# Altium PCB MAIN.PcbDoc
Units mm, origin at the board's own origin, x right, y up, seen from the top; angles counter-clockwise.
Board outline 46.35 x 37.46 mm, 2 copper layers (Top Layer, Bottom Layer); 48 components, 40 nets, 162 pads, 7 vias.
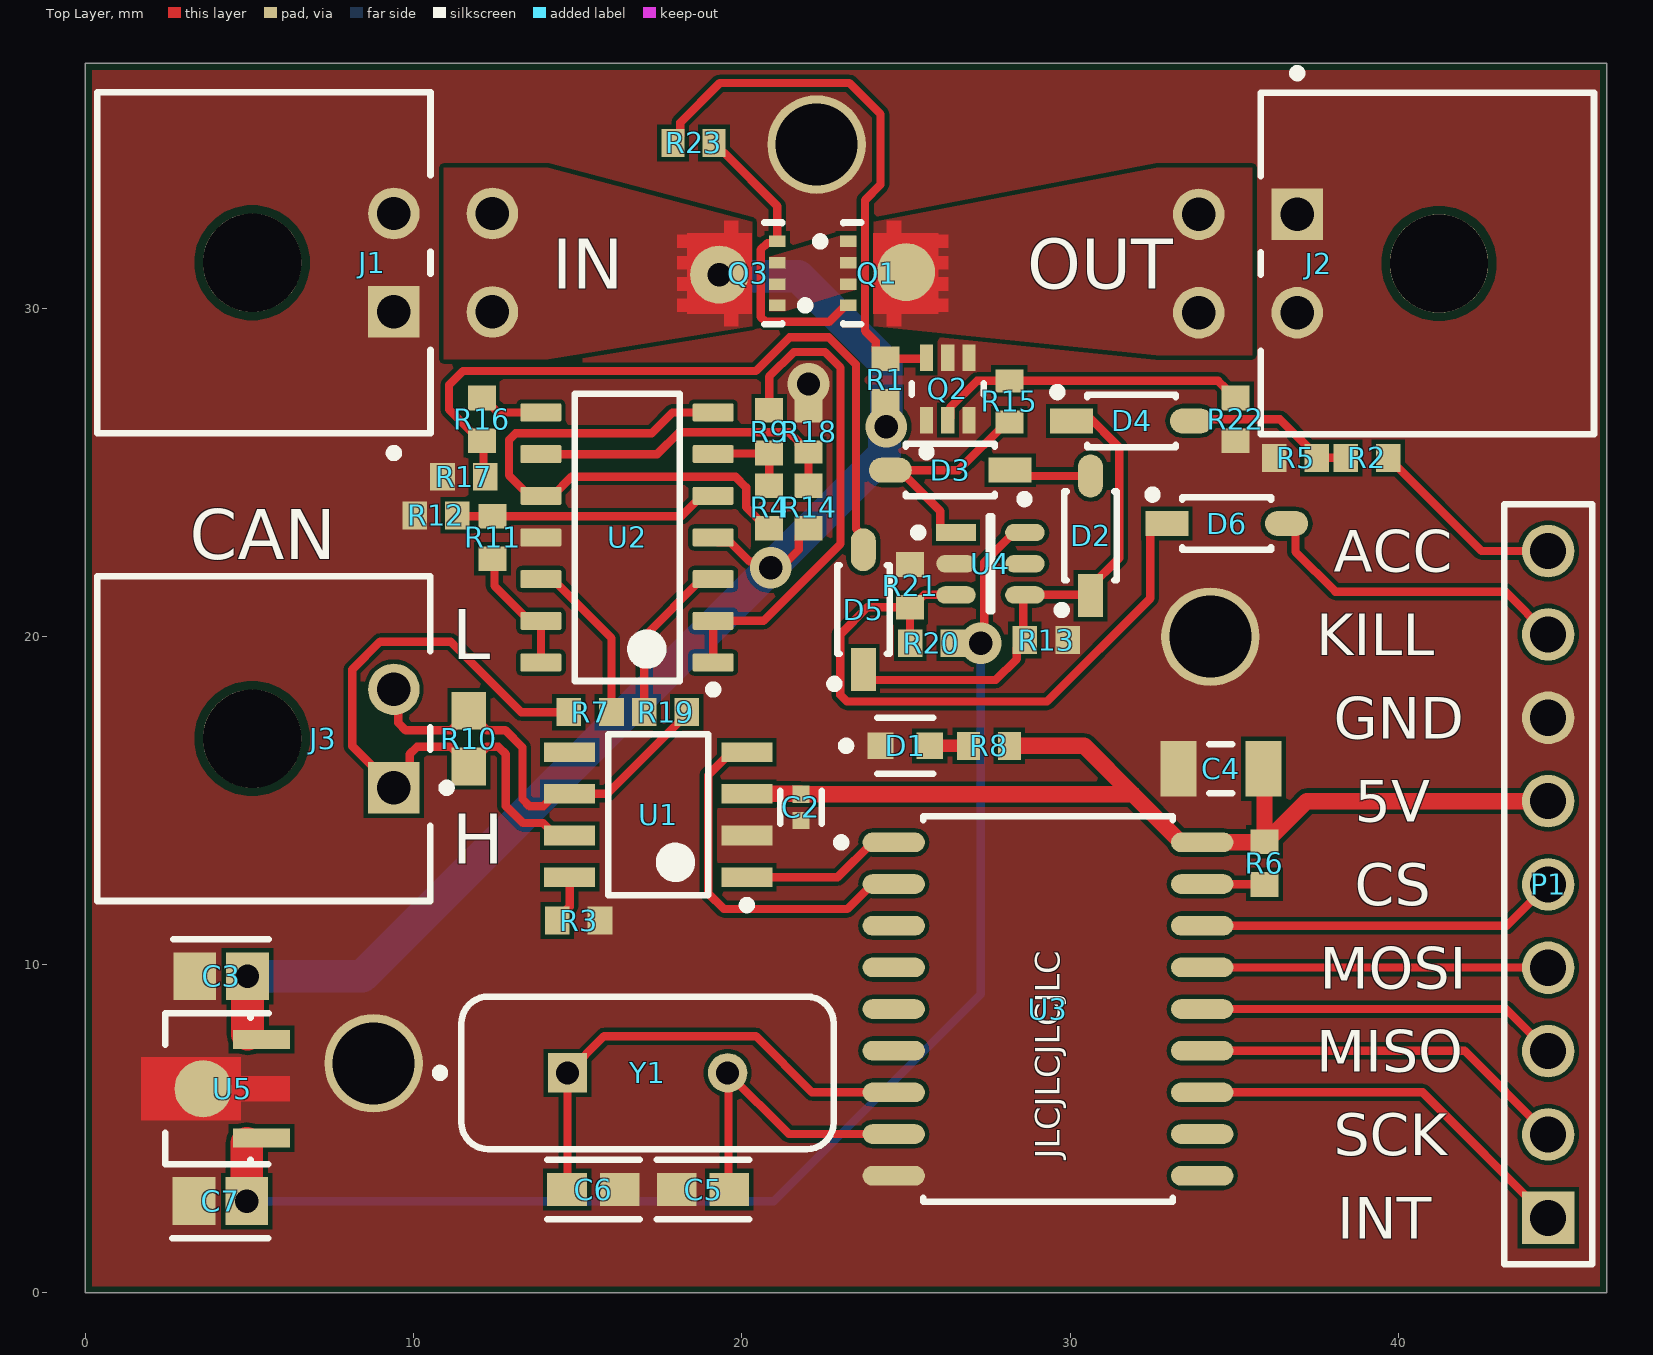
[diagram p0: Top Layer view]
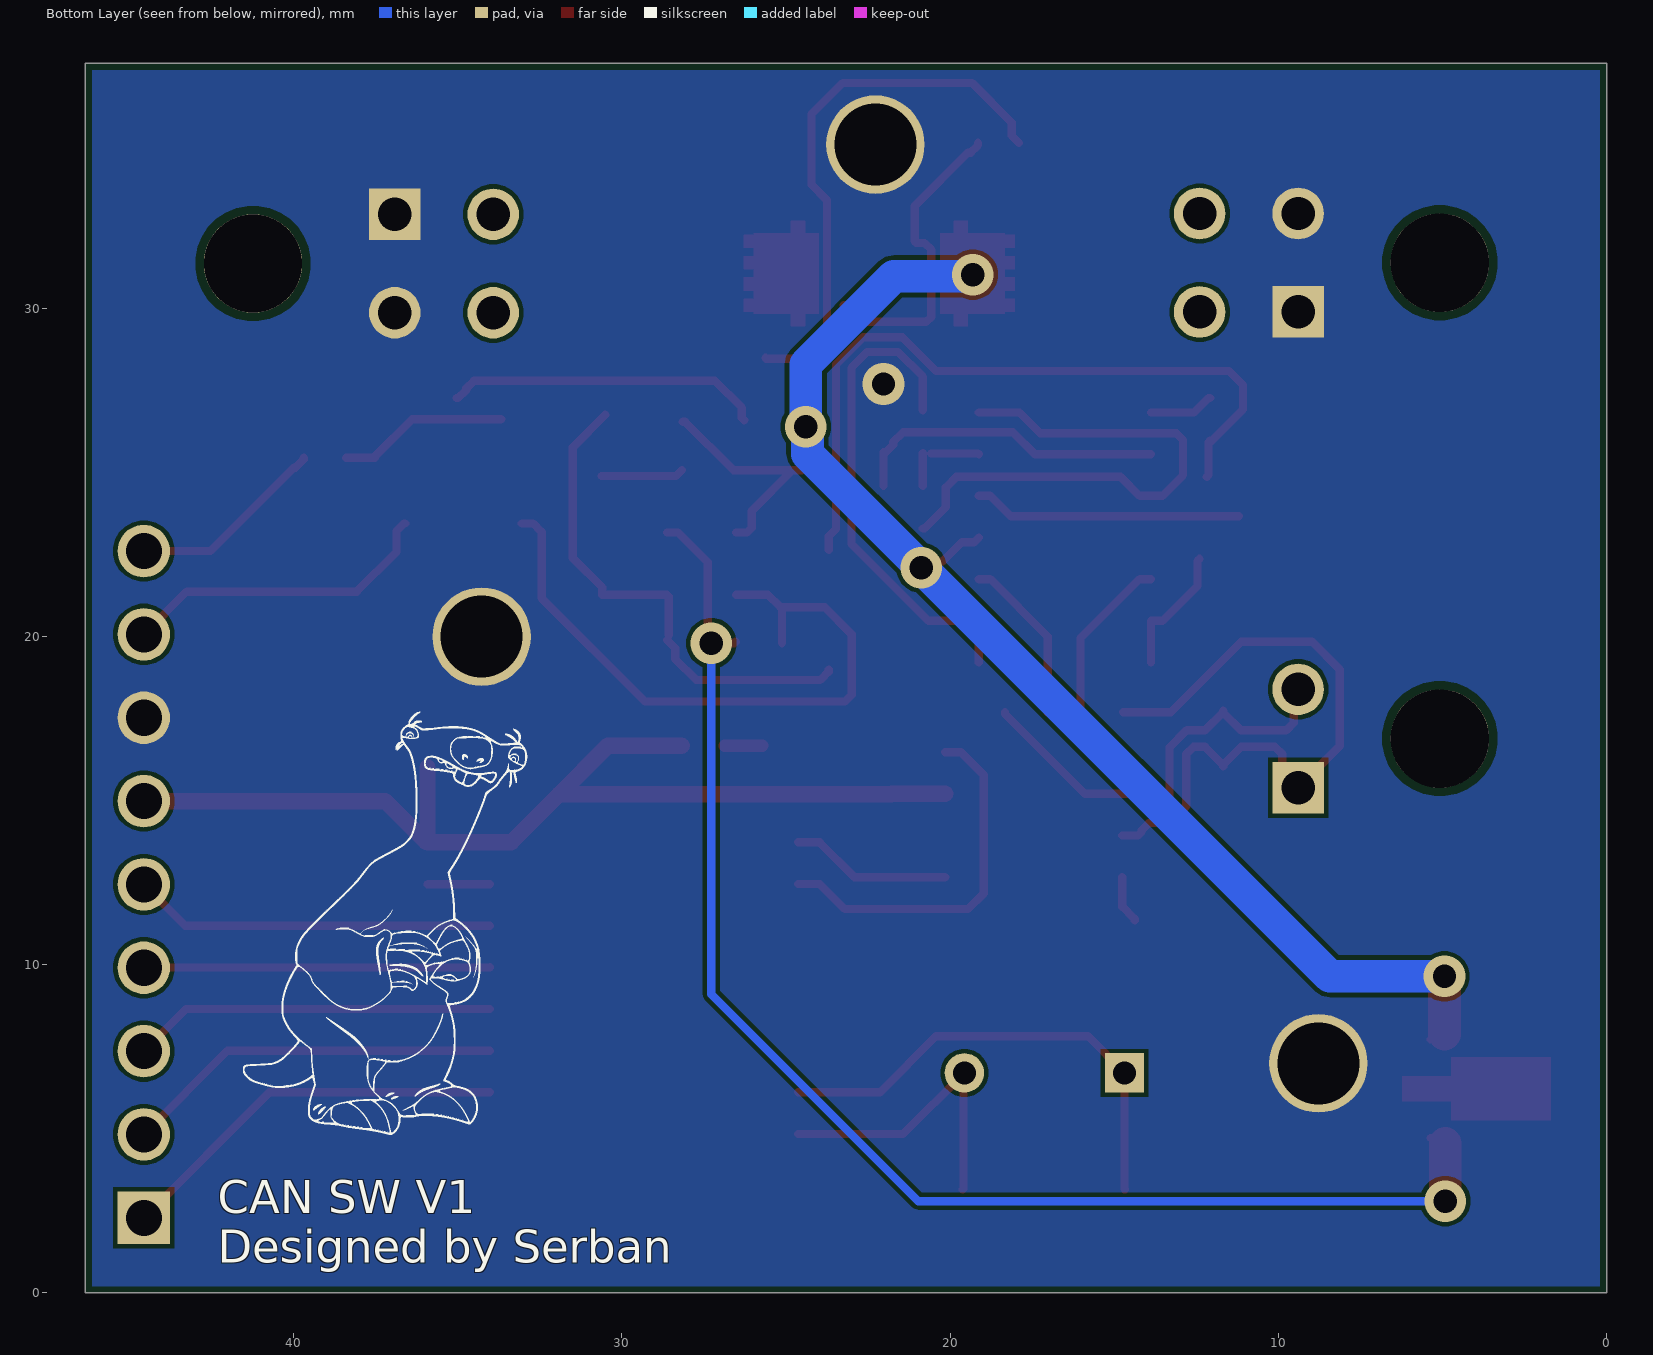
[diagram p1: Bottom Layer view, seen from below]
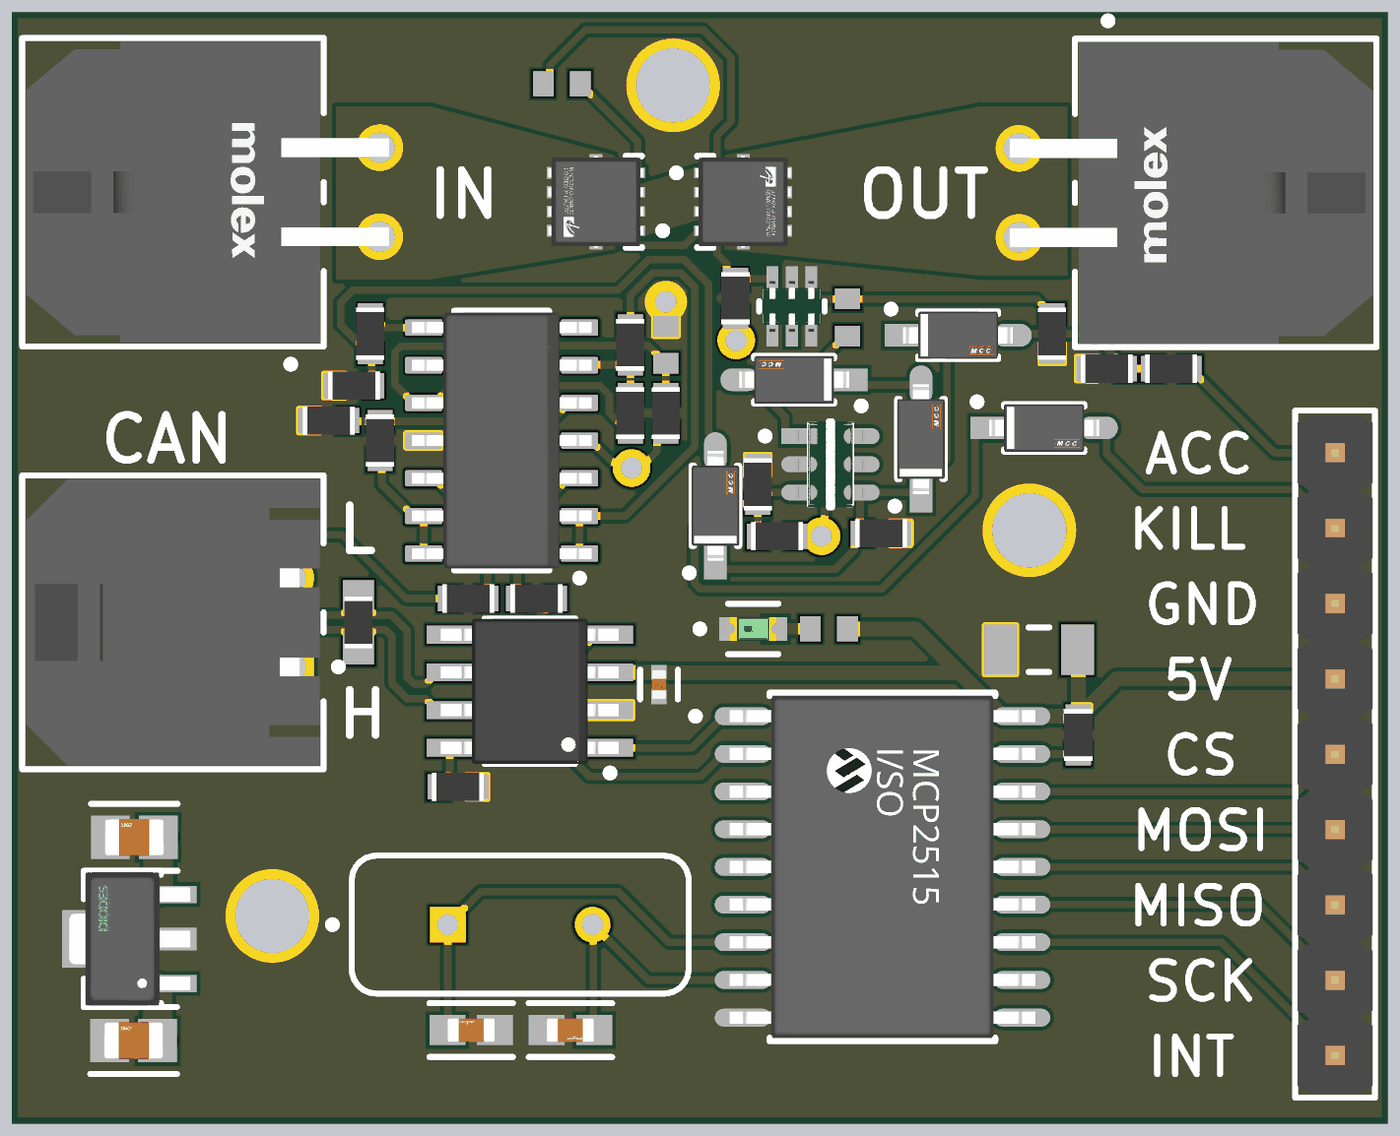
[diagram p2: 3D render of the assembled board from above, using the file's embedded part models]

## Layer stack, top to bottom
Top Solder: solder mask 0.0102, Solder Resist, Dk 3.5
Top Layer: signal copper 0.0356
Dielectric 1: dielectric 0.32, FR-4, Dk 4.8
Bottom Layer: signal copper 0.0356
Bottom Solder: solder mask 0.0102, Solder Resist, Dk 3.5

## Board outline
-0.005,37.47 46.35,37.47 46.35,0.005 -0.005,0.005

## Design rules (kind name [scope] priority, off if disabled: settings)
BoardOutlineClearance [All] p1: gap=0.2 ignorepadtopadclearanceinfootprint=FALSE
Clearance [All] p1: gap=0.127 ignorepadtopadclearanceinfootprint=FALSE except(0.25: Arc-Hole Track-Hole SMDPad-Hole THPad-Hole Via-Hole Fill-Hole Poly-Hole Region-Hole Text-Hole)
ComponentClearance [All] p1: gap=0.127 collisioncheckmode=3 verticalgap=0.127 showdistances=TRUE
DiffPairsRouting [All] p1: maxlimit=0.254 minlimit=0.127 mostfreqgap=0.127 toplayer_minwidth=0.127 toplayer_maxwidth=25.4 toplayer_prefwidth=0.127 bottomlayer_minwidth=0.127 bottomlayer_maxwidth=25.4 bottomlayer_prefwidth=0.127 maxuncoupledlength=12.7
Height [All] p1: minheight=0 maxheight=1816.048 prefheight=12.7
HoleSize [All] p1: absolutevalues=TRUE maxlimit=6.3 minlimit=0.3 maxpercent=80.000 minpercent=20.000
HoleToHoleClearance [All] p1: gap=0.25 allowstackedmicrovias=FALSE
MinimumAnnularRing [All] p1: minimumring=0.076
MinimumSolderMaskSliver [All] p1: minsoldermaskwidth=0
PlaneClearance [All] p1: clearance=0.127
PlaneConnect PlaneConnectPowerPads [InPadClass('PowerPads')] p1: planeconnectstyle=Direct reliefexpansion=0.508 reliefentries=4 reliefconductorwidth=0.254 reliefairgap=0.254
PlaneConnect [All] p2: pad.planeconnectstyle=Relief pad.reliefexpansion=0.3 pad.reliefentries=4 pad.reliefconductorwidth=0.127 pad.reliefairgap=0.127 via.planeconnectstyle=Direct via.reliefexpansion=0.3 via.reliefentries=4 via.reliefconductorwidth=0.127 via.reliefairgap=0.127
PolygonConnect PolygonConnectPowerPads [All vs (InPadClass('PowerPads'))] p1: connectstyle=Direct reliefconductorwidth=0.254 reliefentries=4 polygonreliefangle="90 Angle" airgapwidth=0.254
PolygonConnect [All] p2: connectstyle=Direct reliefconductorwidth=0.127 reliefentries=4 polygonreliefangle="90 Angle" airgapwidth=0.127
RoutingVias [All] p1: holewidth=0.3 width=0.6 viastyle="Through Hole" minholewidth=0.3 minwidth=0.6 maxholewidth=0.6 maxwidth=6.6
SilkToSilkClearance [All] p1: silktosilkclearance=0
SilkToSolderMaskClearance [IsPad] p1: minsilkscreentomaskgap=0.127 clearancetoexposedcopper=TRUE
SolderMaskExpansion [All] p1: expansion=0.075 istentingtop=FALSE
Width [All] p1: maxlimit=25.4 minlimit=0.127 preferedwidth=0.127 minimp=50.000000 maximp=50.000000 favimp=50.000000
20 further rules are at their usual default settings.

## Classes and differential pairs
differential pair CAN: +CAN_P -CAN_N

## Components (designator, comment, footprint, x,y, rotation, side; value= is the part's Value field where it differs from the comment)
C2 "C0402C104K8PACTU" FP-C0402-BB-MFG 21.8,14.8 r270 top value="0.10 μF"
C3 "CL21B225KAFNNNE" FP-0805-L_2_01_0_2-W_1_25-IPC_B 4.128,9.65 r180 top
C4 "1206GC102KAT1A" AVX-1206-2_L 34.6,15.975 r0 top
C5 "GRM188R60J106ME47D" FP-GRM188-0_1-e0_2_0_55-IPC_A 18.815,3.152 r0 top
C6 "GRM188R60J106ME47D" FP-GRM188-0_1-e0_2_0_55-IPC_A 15.473,3.152 r180 top
C7 "CL21B225KAFNNNE" FP-0805-L_2_01_0_2-W_1_25-IPC_B 4.103,2.8 r180 top
D1 "LTST-C190GKT" FP-LTST-C190GKT-MFG 24.975,16.675 r0 top
D2 "1N4148W-TP" FP-SOD-123-IPC_A 30.625,23.075 r90 top
D3 "1N4148W-TP" FP-SOD-123-IPC_A 26.35,25.075 r180 top
D4 "1N4148W-TP" FP-SOD-123-IPC_A 31.875,26.575 r0 top
D5 "1N4148W-TP" FP-SOD-123-IPC_A 23.7,20.825 r90 top
D6 "1N4148W-TP" FP-SOD-123-IPC_A 34.775,23.45 r0 top
J1 "43045-0402" FP-43045-0402-MFG 5.43,31.398 r270 top
J2 "43045-0402" FP-43045-0402-MFG 40.889,31.374 r90 top
J3 "43650-0201" FP-43650-0201-MFG 5.425,16.896 r270 top
P1 "61300911121" 61300911121 44.572,12.451 r90 top
Q1 "SISH615ADN-T1-GE3" SISH615ADN-T1-GE3-Footprint-1 24.636,31.11 r270 top
Q2 "SSM6N7002KFU,LF" FP-SSOP6-P-0_65A-MFG 26.275,27.55 r90 top
Q3 "SISH615ADN-T1-GE3" SISH615ADN-T1-GE3-Footprint-1 19.677,31.035 r90 top
R1 "ERJ3EKF1002V" RESC1609X55X30LL15T15 24.375,27.825 r270 top
R2 "ERJ3EKF1002V" RESC1609X55X30LL15T15 39.05,25.45 r0 top
R3 "ERJ3EKF1002V" RESC1609X55X30LL15T15 15.025,11.35 r180 top
R4 "ERJ3EKF1002V" RESC1609X55X30LL15T15 20.832,23.95 r270 top
R5 "ERJ3EKF1002V" RESC1609X55X30LL15T15 36.875,25.45 r0 top
R6 "ERJ3EKF1002V" RESC1609X55X30LL15T15 35.925,13.1 r270 top
R7 "ERJ3EKF1002V" RESC1609X55X30LL15T15 15.375,17.7 r0 top
R8 "ERJ-3EKF1001V" RESC1608X55X30LL15T15 27.525,16.675 r0 top
R9 "ERJ3EKF1002V" RESC1609X55X30LL15T15 20.832,26.25 r270 top
R10 "ERJ-3EKF1200V" RESC1609X55X30ML15T15 11.679,16.896 r270 top
R11 "ERJ3EKF1002V" RESC1609X55X30LL15T15 12.4,23.025 r90 top
R12 "ERJ3EKF1002V" RESC1609X55X30LL15T15 10.675,23.7 r180 top
R13 "ERJ3EKF1002V" RESC1609X55X30LL15T15 29.275,19.9 r0 top
R14 "ERJ3EKF1002V" RESC1609X55X30LL15T15 22.032,23.95 r270 top
R15 "ERJ-3EKF1001V" RESC1608X55X30LL15T15 28.15,27.175 r270 top
R16 "ERJ3EKF1002V" RESC1609X55X30LL15T15 12.075,26.625 r90 top
R17 "ERJ3EKF1002V" RESC1609X55X30LL15T15 11.525,24.875 r0 top
R18 "ERJ-3EKF1001V" RESC1608X55X30LL15T15 22.032,26.25 r270 top
R19 "ERJ3EKF1002V" RESC1609X55X30LL15T15 17.675,17.7 r180 top
R20 "ERJ3EKF1002V" RESC1609X55X30LL15T15 25.775,19.8 r180 top
R21 "ERJ3EKF1002V" RESC1609X55X30LL15T15 25.125,21.55 r270 top
R22 "ERJ3EKF1002V" RESC1609X55X30LL15T15 35.041,26.625 r270 top
R23 "ERJ-3EKF1001V" RESC1608X55X30LL15T15 18.525,35.05 r180 top
U1 "MCP2551-I/SN" MCHP-SN8_V 17.45,14.575 r180 top
U2 "LM324D" D0014A_L 16.5,23.025 r180 top
U3 "MCP2515-I/SO" FP-C04-051-MFG 29.328,8.653 r0 top
U4 "TLV1805DBVR" FP-DBV0006A-IPC_C 27.575,22.225 r0 top
U5 "AP7381-50Y-13" FP-SOT89-MFG 3.724,6.225 r90 top
Y1 "FOXSLF/160-20" FOX-FOXSLF160-20 17.124,6.708 r0 top

## Footprints (in the part's own frame and the unit in brackets; to place one, negate y for a bottom-side part, rotate by r counter-clockwise, add the part's x,y. Pads: shape width x height; smd on the part's side, far side on the other; paste and mask are expansions set on the pad)
61300911121 [mm] "Pin Header, pitch 2.54 mm, THT, Vertical, single row, 9p"
  rect 1.6x1.6 hole 1.1: 1(-10.16,0)
  round 1.6 hole 1.1: 2(-7.62,0) 3(-5.08,0) 4(-2.54,0) 5(0,0) 6(2.54,0) 7(5.08,0) 8(7.62,0) 9(10.16,0)
  silkscreen extent -11.58,-1.35 11.58,1.35, body extent -11.43,-1.27 11.43,1.27, height 8.57
AVX-1206-2_L [mm] "SMD, 2-Leads, Body 3.4x1.8mm, IPC High Density"
  rect 1.1x1.7 smd: 1(-1.3,0) 2(1.3,0)
  silkscreen extent -0.35,-0.75 0.35,0.75, body extent -1.7,-0.9 1.7,0.9, height 1.52
D0014A_L [mm] "SOIC, 14-Leads, Body 8.75x4mm, Pitch 1.27mm, IPC High Density"
  rrect18% 1.25x0.55 smd: 1(-2.625,3.81) 2(-2.625,2.54) 3(-2.625,1.27) 4(-2.625,0) 5(-2.625,-1.27) 6(-2.625,-2.54) 7(-2.625,-3.81) 8(2.625,-3.81) 9(2.625,-2.54) 10(2.625,-1.27) 11(2.625,0) 12(2.625,1.27) 13(2.625,2.54) 14(2.625,3.81)
  silkscreen extent -2.75,-4.38 1.6,4.76, body extent -3.02,-4.32 3.02,4.32, height 1.59
FOX-FOXSLF160-20 [mm] "THD, 2-Leads, Body 11.35x4.65mm"
  rect 1.2x1.2 hole 0.7: 1(-2.44,0)
  round 1.2 hole 0.7: 2(2.44,0)
  silkscreen extent -6.45,-2.32 5.68,2.32, body extent -5.67,-2.32 5.68,2.33, height 3.6
FP-0805-L_2_01_0_2-W_1_25-IPC_B [mm]
  rect 1.305x1.456 smd paste+0 mask+0: 1(-0.806,0) 2(0.806,0)
  silkscreen extent -1.46,-1.13 1.46,1.13, body extent -1.71,-0.98 1.71,0.98, height 0.25
FP-43045-0402-MFG [mm]
  rect 1.57x1.57 hole 1.02 paste-1000 mask+0: 1(1.5,3.965)
  round 1.57 hole 1.02 paste-1000 mask+0: 2(-1.5,3.965) 3(1.5,6.965) 4(-1.5,6.965)
  round 3 hole 3 unplated paste-1000 mask+0: ""(0,-0.355)
  silkscreen extent -5.2,-5.08 5.92,5.08, body extent -5.3,-5.18 5.3,7.85, height 0.25
FP-43650-0201-MFG [mm]
  rect 1.57x1.57 hole 1.02 paste-1000 mask+0: 1(1.5,3.97)
  round 1.57 hole 1.02 paste-1000 mask+0: 2(-1.5,3.97)
  round 3 hole 3 unplated paste-1000 mask+0: ""(0,-0.35)
  silkscreen extent -4.95,-5.07 4.95,5.7, body extent -5.05,-5.18 5.05,5.18, height 0.25
FP-C04-051-MFG [mm]
  rrect100% 1.9x0.6 smd paste+0 mask+0: 1(-4.7,5.08) 2(-4.7,3.81) 3(-4.7,2.54) 4(-4.7,1.27) 5(-4.7,0) 6(-4.7,-1.27) 7(-4.7,-2.54) 8(-4.7,-3.81) 9(-4.7,-5.08) 10(4.7,-5.08) 11(4.7,-3.81) 12(4.7,-2.54) 13(4.7,-1.27) 14(4.7,0) 15(4.7,1.27) 16(4.7,2.54) 17(4.7,3.81) 18(4.7,5.08)
  silkscreen extent -6.42,-5.87 3.8,5.87, body extent -5.75,-6.12 5.75,6.12, height 0.25
FP-C0402-BB-MFG [mm]
  rect 0.52x0.52 smd paste+0 mask+0: 1(-0.4,0) 2(0.4,0)
  silkscreen extent -0.5,-0.64 0.5,0.64, body extent -0.8,-0.4 0.8,0.4, height 0.25
FP-DBV0006A-IPC_C [mm]
  rect 1.205x0.53 smd paste+0 mask+0: 1(-1.05,0.95)
  rrect100% 1.205x0.53 smd paste+0 mask+0: 2(-1.05,0) 3(-1.05,-0.95) 4(1.05,-0.95) 5(1.05,0) 6(1.05,0.95)
  silkscreen extent -2.33,-1.45 0.05,1.45, body extent -1.75,-1.55 1.75,1.55, height 0.25
FP-GRM188-0_1-e0_2_0_55-IPC_A [mm]
  rect 1.208x1.012 smd paste+0 mask+0: 1(-0.802,0) 2(0.802,0)
  silkscreen extent -1.41,-0.91 1.41,0.91, body extent -1.91,-1.01 1.91,1.01, height 0.25
FP-LTST-C190GKT-MFG [mm]
  rect 0.8x0.8 smd paste+0 mask+0: 1(-0.75,0) 2(0.75,0)
  silkscreen extent -1.92,-0.85 0.85,0.85, body extent -1.25,-0.55 1.25,0.55, height 0.25
FP-SOD-123-IPC_A [mm]
  rect 1.308x0.762 smd paste+0 mask+0: 1(-1.825,0)
  rrect100% 1.308x0.762 smd paste+0 mask+0: 2(1.825,0)
  silkscreen extent -2.39,-0.8 1.35,1.01, body extent -2.98,-1.3 2.98,1.3, height 0.25
FP-SOT89-MFG [mm]
  rect 0.58x1.73 smd paste+0 mask+0: 1(-1.5,-1.635) 3(1.5,-1.635)
  round 1.74 smd paste+0 mask+0: 2(0,0.146)
  Top Layer region: -0.38,-2.5 0.38,-2.5 0.38,-1 0.967,-1 0.967,2.03 -0.967,2.03 -0.967,-1 -0.38,-1 -0.38,-2.5
  silkscreen extent -2.3,-1.3 2.3,1.3, body extent -2.4,-2.6 2.4,2.13, height 0.25
FP-SSOP6-P-0_65A-MFG [mm]
  rect 0.8x0.4 smd paste+0 mask+0: 1(-0.95,0.65) 2(-0.95,0) 3(-0.95,-0.65) 4(0.95,-0.65) 5(0.95,0) 6(0.95,0.65)
  silkscreen extent -2.05,-1.1 0.18,1.1, body extent -1.45,-1.2 1.45,1.2, height 0.25
MCHP-SN8_V [mm] "SOIC, 8-Leads, Body 4.9x3.9mm, Pitch 1.27mm"
  rect 1.55x0.6 smd: 1(-2.7,1.905) 2(-2.7,0.635) 3(-2.7,-0.635) 4(-2.7,-1.905) 5(2.7,-1.905) 6(2.7,-0.635) 7(2.7,0.635) 8(2.7,1.905)
  silkscreen extent -2.83,-2.45 1.53,2.88, body extent -3,-2.45 3,2.45, height 1.75
RESC1608X55X30LL15T15 [mm] "Chip Resistor, 2-Leads, Body 1.60x0.80mm, IPC High Density"
  rect 0.7x0.85 smd: 1(-0.625,0) 2(0.625,0)
  body extent -0.87,-0.48 0.87,0.48, height 0.55
RESC1609X55X30LL15T15 [mm] "Chip Resistor, 2-Leads, Body 1.75x0.95mm, IPC High Density"
  rect 0.75x0.85 smd: 1(-0.65,0) 2(0.65,0)
  body extent -0.87,-0.48 0.87,0.48, height 0.55
RESC1609X55X30ML15T15 [mm] "Chip Resistor, 2-Leads, Body 1.75x0.95mm, IPC Low Density"
  rect 1.15x1.05 smd: 1(-0.85,0) 2(0.85,0)
  body extent -0.87,-0.48 0.87,0.48, height 0.55
SISH615ADN-T1-GE3-Footprint-1 [mm]
  rect 0.35x0.5 smd paste+0 mask+0: 1(-0.937,-1.4) 2(-0.288,-1.4) 3(0.363,-1.4) 4(1.012,-1.4)
  round 1.769 smd paste+0 mask+0: 5-6-7-8(0,0.367)
  Top Layer region: -1.187,-0.63 -1.187,-0.215 -1.568,-0.215 -1.568,0.215 -1.187,0.215 -1.187,1.35 -1.137,1.35 -1.137,1.65 -0.737,1.65 -0.737,1.35 -0.487,1.35 -0.487,1.65 -0.088,1.65 -0.088,1.35 0.163,1.35 0.163,1.65 0.563,1.65 0.563,1.35 0.813,1.35 0.813,1.65 1.212,1.65 1.212,1.35 1.262,1.35 1.262,0.215 1.643,0.215 1.643,-0.215 1.262,-0.215 1.262,-0.63
  silkscreen extent -1.51,-2.37 1.59,-1.01, body extent -1.67,-1.75 1.74,1.75, height 0.25

## Part data
C2: library part CMP-2008-02046-2, "CAP CER 0.1UF 10V X5R 0402", Capacitance="0.10 μF", Manufacturer=Kemet, Package=C0402-BB, Temperature="-55°C to +125°C", Temperature Characteristic=X5R, Temperature Coefficient=15%, Temperature Range High=+125°C, Temperature Range Low=-55°C, Tolerance=0.1, Voltage Rating="10 V", Automotive=No, Category=Cap, ComponentLink2Description=Datasheet, ComponentLink2URL=https://content.kemet.com/datasheets/KEM_C1002_X7R_SMD.pdf, Device Class L1="Passive Components", Device Class L2=Capacitors, Device Class L3="Ceramic Capacitors", Digikey Description="CAP CER 0.1UF 10V X5R 0402", Height=0.55mm, Ipc Land Pattern Name=CAPC10050X50, Lead Free=Yes, Manufacturer Part Number=C0402C104K8PACTU, Material=Ceramic, Mouser Description="Capacitor 100 nF 10 VDC 0402", Octopart=https://octopart.com/c0402c104k8pactu-kemet-140039, RoHS=TRUE
C3 C7: library part CMP-2007-04514-2, Capacitance=2.2uF, Case Code (Imperial)=0805, Case Code (Metric)=2012, Dielectric=X7R, Max Operating Temperature=125°C, Min Operating Temperature=-55°C, Package Quantity=3000, Tolerance=10%, Voltage=25V, Case/Package=0805, Construction=Flat, Contact Plating=Tin, Depth=1.25mm, Height=1.52mm, Lead Free="Lead Free", Length=2.01mm, Mount="Surface Mount", Number of Pins=2, Packaging="Tape and Reel", Radiation Hardening=No, REACH SVHC="No SVHC", RoHS Compliant=Yes, Series=FlEXITERM, Termination=SMD/SMT, Thickness=0.06inch, Voltage Rating=25V, Voltage Rating (DC)=25V, Width=0.049inch
C4: library part CMP-2000-05468-1, "Chip Capacitor, 1 nF, +/- 10%, -55 to 125 degC, 1206 (3216 Metric), RoHS, Tape and Reel", Capacitance=0.001uF, Case Size/Dimension=1206, Dielectric=X7R, Manufacturer=AVX, Package Description="2-Pin SMD, Body 3.4 x 1.8 mm", Rated Voltage=2000V, Tolerance=10%, Tolerance (%)=±10%, Datasheet URL=https://datasheet.ciiva.com/11787/0900766b80ed4c37-11787781.pdf, Datasheet Version=11/2010, Manufacturer URL=http://www.avx.com/, Mounting Technology=SurfaceMount, Package Reference=1206, PartNumber=1206GC102KAT1A, Voltage Rating DC=2000V
C5 C6: library part CMP-2006-02792-2, "Chip Multilayer Ceramic Capacitors for General Purpose, 0603, 10uF, X5R, 15%, 20%, 6.3V", Capacitance=10uF, Case Code (Imperial)=0603, Case Code (Metric)=1608, Dielectric=X5R, Max Operating Temperature=85°C, Min Operating Temperature=-55°C, Package Quantity=4000, Tolerance=20%, Voltage=6.3V, Case/Package=0603, Depth=0.8mm, Height=0.8mm, Lead Free="Lead Free", Length=1.6mm, Material=Ceramic, Mount="Surface Mount", Packaging="Tape and Reel", Radiation Hardening=No, REACH SVHC="No SVHC", Termination=SMD/SMT, Thickness=0.035inch, Voltage Rating=6.3V, Voltage Rating (DC)=6.3V, Width=0.031inch
D1: library part CMP-22017-000005-2, "LED GREEN CLEAR CHIP SMD", Case Code (Imperial)=0603, Case Code (Metric)=1608, Color=Green, Forward Current=30mA, Forward Voltage=2.1V, Lens Color=Colorless, Max Operating Temperature=85°C, Min Operating Temperature=-55°C, Package Quantity=1, Power Dissipation=100mW, Reverse Voltage=5V, Test Current=10mA, Voltage=2V, Case/Package=0603, Depth=0.8mm, Dominant Wavelength=569nm, Height=0.8mm, Illumination Color=Green, Lead Free="Lead Free", Length=1.6mm, Lens Style=Clear, Lens Transparency=Clear, Luminous Intensity=6mcd, Mount="Surface Mount", Number of Elements=1, Number of LEDs=1, Number of Pins=2, Packaging="Tape and Reel", Power Rating=100mW, Radiation Hardening=No, Viewing Angle=130°, Wavelength=565nm, Width=0.8mm
D2 D3 D4 D5 D6: library part CMP-2000-04993-2, "DIODE GEN PURP 100V 150MA SOD123", Average Rectified Current=150mA, Capacitance=4pF, Forward Voltage=1V, Max Forward Surge Current (Ifsm)=1A, Max Operating Temperature=150°C, Max Repetitive Reverse Voltage (Vrrm)=100V, Max Reverse Leakage Current=5uA, Max Surge Current=2A, Min Operating Temperature=-65°C, Package Quantity=3000, Power Dissipation=400mW, Current Rating=150mA, Element Configuration=Single, Forward Current=150mA, Height=1.2mm, Lead Free="Lead Free", Length=2.85mm, Max Reverse Voltage (DC)=100V, Mount="Surface Mount", Number of Pins=2, Output Current=150mA, Packaging="Tape and Reel", Peak Non-Repetitive Surge Current=2A, Polarity=Standard, Radiation Hardening=No, Recovery Time=4ns, Reverse Recovery Time=4ns, Voltage Rating (DC)=100V, Width=1.8mm
J1 J2: library part CMP-04776-000323-1, "CONN HEADER R/A 4POS 3MM", Case/Package=0402, Color=Black, Contact Resistance=10mR, Current Rating=5A, Flammability Rating="UL94 V-0", Insulation Resistance=1GR, Max Operating Temperature=105°C, Max Voltage Rating (DC)=250.25kV, Min Operating Temperature=-40°C, Package Quantity=2232, Voltage Rating=600V, Voltage Rating (DC)=250V, Contact Gender=Male, Contact Material=Brass, Contact Plating=Gold, Depth=12.2mm, Diameter=3mm, Gender=Male, Glow Wire Compliant=Compliant, Halogen Free="Low Halogen", Height=8.77mm, Housing Color=Black, Housing Material=Thermoplastic, Lead Free="Lead Free", Length=10.15mm, Max Current Rating=5A, Mount="Through Hole", Number of Circuits=4, Number Of Contacts=4, Number of Positions=4, Number Of Rows=2, Orientation="Right Angle", Packaging=Tray, Pitch=3mm, Row Spacing=3mm, Series="Micro-Fit 3.0", Termination=Solder
J3: library part CMP-04776-000557-1, "CONN HEADER R/A 2POS 3MM", Case/Package=0201, Color=Black, Contact Resistance=10mR, Current Rating=5A, Flammability Rating="UL94 V-0", Insulation Resistance=1GR, Max Operating Temperature=105°C, Min Operating Temperature=-40°C, Package Quantity=3927, Voltage Rating=600V, Voltage Rating (DC)=250V, Contact Material=Brass, Contact Plating=Gold, Depth=9.9mm, Gender=Male, Glow Wire Compliant=Compliant, Halogen Free="Low Halogen", Housing Color=Black, Housing Material=Thermoplastic, Length=9.65mm, Mount="Through Hole", Number of Circuits=2, Number Of Contacts=2, Number of Ports=1, Number of Positions=2, Number Of Rows=1, Number of Terminals/Pins=2, Orientation="Right Angle", Packaging=Tray, Pitch=3mm, Radiation Hardening=No, Series=43650, Termination=Solder
P1: library part CMP-1502-01080-1, "THT Vertical Pin Header WR-PHD, Pitch 2.54 mm, Single Row, 9 pins", Contact Resistance=20mOhm, Manufacturer="Wurth Elektronik", Operating Temperature=-40to105degC, Rated Current=3A, Withstanding Voltage=500VAC, Working Voltage=250VAC, Datasheet URL=https://katalog.we-online.de/em/datasheet/6130xx11121.pdf, Gender=Male, Manufacturer URL=http://www.we-online.de, Mounting Technology=THT, Orientation=Vertical, Package Reference=61300911121, Packaging=Bag, Part Number=61300911121, Pin Number=9, Pitch=2.54mm, Publisher=WurthElektronik, Row Number=Single
Q1 Q3: library part CMP-013-00036-1, "Trans MOSFET P-CH 20V 22.1A 8-Pin PowerPAK 1212 EP T/R"
Q2: library part CMP-35916-000009-1, "MOSFET 2N-CH 60V 0.3A", Continuous Drain Current (ID)=300mA, Drain to Source Voltage (Vdss)=60V, Input Capacitance=40pF, Max Power Dissipation=285mW, FET Type="2 N-Channel", Mount="Surface Mount", Packaging="Tape and Reel", Rds On Max=1.5R
R1 R2 R3 R4 R5 R6 R7 R9 R11 R12 R13 R14 R16 R17 R19 R20 R21 R22: library part CMP-1012-00623-3, "Chip Resistor, 10 KOhm, +/- 1%, 0.1 W, -55 to 155 degC, 0603 (1608 Metric), RoHS, Tape and Reel", Case Code (Imperial)=0603, Case Code (Metric)=1608, Manufacturer=Panasonic, Max Operating Temperature=155degC, Max Power Dissipation=100mW, Min Operating Temperature=-55degC, Package Description="2-Pin Surface Mount Device, Body 1.6 x 0.85 mm", Package Quantity=1, Package Reference=603, Resistance=10KOhm, Temperature Coefficient=100ppm\/degreesC, Tolerance=1%, Voltage Rating=75V, Case\/Package=0603, Composition=ThickFilm, Contact Plating=Tin, Datasheet URL=https://industrial.panasonic.com/cdbs/www-data/pdf/RDA0000/AOA0000C304.pdf, Datasheet Version=02/2017, Depth=0.8mm, Height=0.45mm, Lead Free=LeadFree, Length=1.6mm, Manufacturer URL=http://www.panasonic.com/, Military Standard=Not, Mount=SurfaceMount, Mounting Technology=SurfaceMount, Number of Pins=2, Number of Terminations=2, Packaging=TapeandReel, Power Rating=100mW, Radiation Hardening=No, REACH SVHC=NoSVHC, RoHSCompliant=true, Termination=SMD/SMT, Voltage Rating (DC)=75V, Width=0.031inch
R8 R15 R18 R23: library part CMP-2000-00180-1, Manufacturer=Panasonic, Part Number=ERJ-3EKF1001V
R10: library part CMP-2000-00213-2, "Chip Resistor, 120 Ohm, +/- 1%, 0.1 W, -55 to 155 degC, 0603 (1608 Metric), RoHS, Tape and Reel", Case Code (Imperial)=0603, Case Code (Metric)=1608, Manufacturer=Panasonic, Max Operating Temperature=155degC, Max Power Dissipation=100mW, Min Operating Temperature=-55degC, Package Description="2-Pin Surface Mount Device, Body 1.6 x 0.85 mm", Package Quantity=1, Resistance=120Ohm, Temperature Coefficient=100ppm/degreesC, Tolerance=1%, Voltage Rating=75V, Case/Package=0603, Composition=ThickFilm, Contact Plating=Tin, Datasheet URL=https://industrial.panasonic.com/cdbs/www-data/pdf/RDA0000/AOA0000C283.pdf, Datasheet Version=42095.0, Depth=0.8mm, Height=0.022inch, Lead Free=LeadFree, Length=1.6mm, Manufacturer URL=http://www.panasonic.com/, Military Standard=Not, Mount=SurfaceMount, Number of Pins=2, Number of Terminations=2, Package Reference=0603, Package URL=http://www.st.com/st-web-ui/static/active/en/resource/technical/document/datasheet/CD00001320.pdf, Packaging=TapeandReel, Power Rating=100mW, Radiation Hardening=No, REACH SVHC=NoSVHC, RoHSCompliant=true, Termination=SMD/SMT, Voltage Rating (DC)=75V, Width=0.031inch
U1: library part CMP-0186-00138-3, "High-Speed CAN Transceiver, /  1 Mb/s, 4.5 to 5.5 V, 8-Pin SOIC (SN), Industrial Temperature, RoHS, Tube", Manufacturer=Microchip, ComponentLink1Description="Manufacturer URL", ComponentLink1URL=http://www.microchip.com/, ComponentLink2Description=Datasheet, ComponentLink2URL=http://ww1.microchip.com/downloads/en/DeviceDoc/21667f.pdf, ComponentLink3Description="Package Specification", ComponentLink3URL=http://www.microchip.com/stellent/groups/techpub_sg/documents/packagingspec/en012702.pdf, DatasheetVersion="Rev. F, 07/2010", Mounting Technology="Surface Mount", PackageDescription="8-Pin Small Outline Integrated Circuit, Body 4.9 x 3.9 mm, Pitch 1.27 mm", PackageReference=SN8, RoHSCompliant=true
U2: library part CMP-2000-06547-1, "Quadruple Operational Amplifier, 0.5 V/us, 1.2 MHz, 3 to 32 V, 0 to 70 degC, 14-Pin SOIC (D), Green (RoHS & no Sb/Br), Tube", Dual Supply Voltage (Max)=±16V, Dual Supply Voltage (Min)=±1.5V, Dual Supply Voltage (Typ)=±3/±5/±9/±12/±15V, Input Bias Current=250nA, Input Offset Voltage=7mV, Manufacturer="Texas Instruments", Operating Temp Range=0Cto70C, Operating Temperature Classification=Commercial, Package Description="14-Pin Small Outline Integrated Circuit, Body 8.65 x 3.9 mm, Pitch 1.27 mm", Package Reference=D0014A, Package Type=SOIC, Power Supply Requirement=Single/Dual, Single Supply Voltage (Max)=32V, Single Supply Voltage (Min)=3V, Single Supply Voltage (Typ)=5/9/12/15/18/24/28V, Voltage Gain in dB=100dB, Common Mode Rejection Ratio=65dB, Datasheet URL=http://www.ti.com/lit/ds/symlink/lm324.pdf, Datasheet Version="Rev. W, 03/2015", Manufacturer URL=http://www.ti.com/, Mounting=SurfaceMount, Mounting Technology=SurfaceMount, Number of  Elements=4, Package URL=http://www.ti.com/lit/ml/mpds177g/mpds177g.pdf, Packaging=Rail/Tube, Pin Count=14, Rail/Rail I/O Type=No, Shut Down Feature=No, Slew Rate=0.5V/us, Technology=Bipolar, Type=GeneralPurposeAmplifier, Unity Gain Bandwidth Product=1.2MHz
U3: library part CMP-0186-00133-3, "IC CAN CONTROLLER W/SPI 18SOIC", Ambient Temperature Range High=+125°C, Ambient Temperature Range Low=-65°C, Manufacturer=Microchip, Max Supply Voltage=5.5V, Min Supply Voltage=2.7V, Nominal Supply Current=10mA, Package=C04-051, Temperature="-40°C to +85°C", Temperature Range High=+85°C, Temperature Range Low=-40°C, Automotive=No, Category=IC, ComponentLink2Description=Datasheet, ComponentLink2URL=http://ww1.microchip.com/downloads/en/DeviceDoc/MCP2515-Stand-Alone-CAN-Controller-with-SPI-20001801J.pdf, Device Class L1="Integrated Circuits (ICs)", Device Class L2="Interface ICs", Device Class L3=Controllers, Digikey Description="IC CAN CONTROLLER W/SPI 18SOIC", Footprint Url=http://ww1.microchip.com/downloads/en/DeviceDoc/18L_SOIC_Wide_7.50_SO_C04-0051D.pdf, Function=Controller, Height=2.65mm, Interface=SPI,CAN, Ipc Land Pattern Name=SOIC127P1030X265-18, Lead Free=Yes, Manufacturer Part Number=MCP2515-I/SO, Mouser Description="CAN Interface IC W/ SPI Interface", Octopart=https://octopart.com/mcp2515-i%2Fso-microchip-430187, RoHS=TRUE, Standoff Height=0.1mm
U4: library part CMP-04896-000098-1, "40V, RAIL-TO-RAIL INPUT, PUSH-PU"
U5: library part CMP-12756-000009-1, "IC REG LINEAR 5V 150MA SOT89", Ambient Temperature Range High=+85°C, Ambient Temperature Range Low=-40°C, Dropout Voltage=1000mV, Manufacturer="Diodes Inc.", Max Junction Temp=+125°C, Max Supply Voltage=40V, Min Supply Voltage=3.3V, Nominal Supply Current=2.5-25uA, Output Current=150mA, Output Voltage=5V, Package=SOT89, Temperature="-40°C to +125°C", Automotive=No, Category=IC, ComponentLink2Description=Datasheet, ComponentLink2URL=https://www.diodes.com/assets/Datasheets/AP7381.pdf, Device Class L1="Integrated Circuits (ICs)", Device Class L2="Power Management ICs", Device Class L3="Voltage Regulators - Linear", Digikey Description="IC REG LINEAR 5V 150MA SOT89", Footprint Url=https://www.diodes.com/assets/Package-Files/SOT89.pdf, Height=1.6mm, Lead Free=Yes, Manufacturer Part Number=AP7381-50Y-13, Number of Outputs=1, Octopart=https://octopart.com/ap7381-50y-13-diodes+inc.-87775116, Output Type=Fixed, RoHS=TRUE, Temperature Range High=+125°C, Temperature Range Low=-40°C
Y1: library part CMP-1749-00003-1, "Resistance Weld Thru-Hole Crystal, 16 MHz, -20 to 70 degC, 2-Pin THD, RoHS, Bulk", Case\Package=Axial, Max Operating Temperature="155 degC", Min Operating Temperature="-55 degC", Package Quantity=200, Power Rating="250 mW", Resistance="221 kohm", Tolerance=1%, Voltage Rating="250 V", ComponentLink1Description="Manufacturer URL", ComponentLink1URL=http://www.foxonline.com/, ComponentLink2Description=Datasheet, ComponentLink2URL=http://www.foxonline.com/pdfs/hc49slf.pdf, DatasheetVersion=Mar-15, Length="0.248 inch", Mount="Through Hole", PackageDescription="2-Pin Through Hole Device, Body 11.35 x 4.65 mm", PackageReference=FOXSLF160-20, Packaging=Bulk, RoHSCompliant=true

## Free pads (board coordinates)
  round 3 hole 2.5: 2(8.775,7) 2(22.275,35) 2(34.275,20)

## Via types
v1: diameter 1.27, hole 0.711, Top Layer to Bottom Layer, 7 vias

## Nets (pads, with @x,y where several pads share a name; then routed paths per layer and width w, separated by ;. In a path a pad name is that pad's centre, name@x,y a point inside that pad or via, vN(x,y) a via of type N, cw(c..) or ccw(c..) an arc to the next point about the centre after c; other vN are vias at no path point)
+5: C2.1 C4.2 P1.6 R6.1 R8.2 U1.3 U3.18 | length 32.2
  Top Layer w0.5: U1.3 21.79,15.21 C2.1 31.91,15.2 33.378,13.733 U3.18 34.036,13.741 35.916,13.741 R6.1 ; C4.2@35.927,16.025 35.926,16.024 35.926,13.751 R6.1 ; P1.6 37.216,14.991 35.975,13.75 R6.1
  Top Layer w0.508: R8.2@28.175,16.675 30.435,16.675 31.91,15.2
ACC_PWR: P1.9 R2.2 | length 6.1
  Top Layer w0.254: R2.2 39.7,25.4 39.948,25.152 39.998,25.152 42.539,22.611 P1.9
CAN_H_BUF: R11.1 U2.13 U2.14 | length 4
  Top Layer w0.254: R11.1 12.46,22.315 12.46,21.55 13.525,20.485 U2.13 U2.14
CAN_L_BUF: R9.1 U2.1 U2.2 | length 15.2
  Top Layer w0.254: U2.1 U2.2 20.66,20.485 23.007,22.832 23.007,28.2 22.532,28.675 21.582,28.675 20.832,27.925 R9.1
CAN_N: J3.2 R10.1 R19.1 U1.6 | length 13.6
  Top Layer w0.254: J3.2 9.529,18.262 9.529,17.373 9.752,17.15 10.283,17.15 11.133,17.15 R10.1@11.679,17.696 ; R10.1 R10.1@11.679,17.696 ; R19.1 18.325,17.65 15.885,15.21 14.275,15.21 14.165,15.101 14.165,15.052 13.942,14.829 13.534,14.829 13.311,15.052 13.311,16.629 12.791,17.15 12.225,17.15 R10.1@11.679,17.696
CAN_P: J3.1 R7.1 R10.2 U1.7 | length 20.7
  Top Layer w0.254: R10.2 R10.2@11.679,16.096 ; R7.1 13.274,17.7 11.124,19.85 8.975,19.85 8.125,19 8.125,16.666 J3.1 9.877,15.878 9.877,16.419 10.1,16.642 10.493,16.642 11.133,16.642 R10.2@11.679,16.096 ; U1.7 14.275,13.94 14.165,14.05 14.165,14.098 13.942,14.321 13.324,14.321 12.803,14.842 12.803,16.419 12.58,16.642 12.225,16.642 R10.2@11.679,16.096
COMP_AMP_OUT: D5.2 R16.1 R17.2 | length 22.4
  Top Layer w0.254: R17.2 12.125,24.925 12.125,25.925 R16.1 12.025,25.975 11.075,26.925 11.075,27.675 11.5,28.1 20.425,28.1 21.45,29.125 22.65,29.125 23.475,28.3 23.475,23.286 23.7,23.061 D5.2
CS: P1.5 U3.16 | length 11.1
  Top Layer w0.254: U3.16 43.314,11.193 P1.5
DIFF_AMP_OUT: R4.2 U2.7 U2.10 | length 17.1
  Top Layer w0.254: U2.7 17.885,26.835 17.25,26.2 13.1,26.2 12.9,26 12.9,24.92 13.525,24.295 U2.10 14.225,24.295 14.805,24.875 19.808,24.875 20.13,24.553 20.13,23.952 20.782,23.3 R4.2
GND: C2.2 C3.2 C4.1 C5.1 C6.1 C7.2 D1.1 J1.1 J1.2 J2.1 J2.2 P1.7 pad.2 Q2.1 Q2.3 Q2.4 Q2.5 R3.1 R5.1 R12.2 R13.2 R17.1 R18.1 R21.1 R22.2 U1.2 U2.11 U3.9 U4.2 U5.2
  other v1: 22.032,27.7
INT: P1.1 U3.12 | length 12.1
  Top Layer w0.254: U3.12 40.75,6.113 P1.1
KILL_SIG: D6.2 P1.8 | length 9.7
  Top Layer w0.254: D6.2 36.638,23.45 36.873,23.215 36.873,22.588 38.086,21.375 43.268,21.375 P1.8
LATCH_5V: C7.1 R20.1 U4.6 U5.1 | length 42.8
  Top Layer w0.254: U5.1@4.909,4.562 5.072,4.725 U5.1 ; R20.1@26.535,19.85 26.585,19.8 v1(27.275,19.8) 27.381,19.906 27.381,22.268 28.288,23.175 U4.6
  Top Layer w1: v1(4.909,2.8) U5.1@4.909,4.562
  Bottom Layer w0.254: v1(4.909,2.8) 20.975,2.8 27.275,9.1 v1(27.275,19.8)
MISO: P1.4 U3.15 | length 10.5
  Top Layer w0.254: U3.15 34.033,9.917 44.566,9.917 P1.4
MOSI: P1.3 U3.14 | length 11.1
  Top Layer w0.254: U3.14 43.29,8.653 P1.3
NetC5_2: C5.2 U3.8 Y1.2 | length 9.4
  Top Layer w0.254: C5.2 19.59,3.178 19.59,6.681 Y1.2 21.429,4.843 U3.8
NetC6_2: C6.2 U3.7 Y1.1 | length 14.7
  Top Layer w0.254: C6.2 14.684,3.164 Y1.1 15.802,7.825 20.425,7.825 22.137,6.113 U3.7
NetD1_2: D1.2 R8.1 | length 1.2
  Top Layer w0.381: D1.2 R8.1@26.875,16.675
NetD2_1: D2.1 D4.1 D5.1 R13.1 U4.4 | length 15.3
  Top Layer w0.254: D5.1 23.7,18.936 23.954,18.682 27.732,18.682 28.377,19.327 28.377,19.652 R13.1 ; R13.1@28.575,20.046 28.575,21.225 U4.4 30.6,21.275 30.6,21.498 31.5,22.398 31.5,25.773 D4.1@30.511,26.763
NetD2_2: D2.2 D3.1 | length 2.5
  Top Layer w0.254: D3.1 28.35,24.9 D2.2
NetD3_2: D3.2 R15.2 U4.1 | length 7
  Top Layer w0.254: D3.2 D3.2@24.798,25.075 ; U4.1 26.187,23.175 26.049,23.313 26.049,23.824 D3.2@24.798,25.075 ; R15.2 28.075,26.55 26.6,25.075 D3.2@24.798,25.075
NetD4_2: D4.2 R2.1 R5.2 | length 5.2
  Top Layer w0.254: D4.2@33.682,26.625 36.4,26.625 37.525,25.5 R5.2 R2.1
NetD6_1: D6.1 R20.2 R21.2 U4.3 | length 20.5
  Top Layer w0.254: R20.2 R21.2 ; U4.3 25.55,21.275 25.175,20.9 R21.2 ; D6.1@33.052,23.45 32.702,23.45 32.448,23.196 32.448,21.173 29.3,18.025 23.2,18.025 23,18.225 23,20.075 23.825,20.9 R21.2
NetQ1_1: Q1.1 Q1.2 Q1.3 Q3.1 Q3.2 Q3.3
NetQ2_2: Q2.2 R15.1 R22.1 | length 9.7
  Top Layer w0.254: Q2.2 26.348,26.673 26.348,26.982 27.166,27.8 R15.1 34.516,27.8 34.743,27.573 34.743,27.523 34.991,27.275 R22.1
NetQ2_6: Q2.6 R1.1 R23.2 | length 16.9
  Top Layer w0.254: R23.2 18.123,35.273 18.123,35.673 19.325,36.875 23.275,36.875 24.225,35.925 24.225,33.775 23.752,33.302 23.752,29.323 24.077,28.998 24.077,28.723 24.325,28.475 25.6,28.475 Q2.6
NetR3_2: R3.2 U1.8 | length 1.5
  Top Layer w0.254: R3.2 14.375,11.4 14.75,11.775 U1.8
NetR4_1: R4.1 R9.2 U2.6 | length 2.5
  Top Layer w0.254: U2.6 19.143,25.583 R9.2@20.583,25.583 ; R9.2@20.814,25.583 R9.2 R4.1
NetR6_2: R6.2 U3.17 | length 1.9
  Top Layer w0.254: U3.17 34.034,12.456 35.919,12.456 R6.2
NetR7_2: R7.2 U2.12 | length 5.2
  Top Layer w0.254: U2.12 14.225,21.755 16.025,19.955 R7.2
NetR11_2: R11.2 R12.1 U2.5 | length 8.2
  Top Layer w0.254: R12.1@11.2,23.675 R11.2 18.155,23.675 18.775,24.295 U2.5
NetR14_1: R14.1 R18.2 U2.9 | length 9.8
  Top Layer w0.254: U2.9 17.42,25.565 18.084,26.229 21.437,26.229 21.734,25.932 21.734,25.848 21.957,25.625 R18.2 R14.1
NetR16_2: R16.2 U2.8 | length 2
  Top Layer w0.254: R16.2 12.125,27.275 12.565,26.835 U2.8
NetR19_2: R19.2 U2.3 | length 5.1
  Top Layer w0.254: R19.2 17.025,20.005 18.775,21.755 U2.3
PMOS_SIG: Q1.4 Q3.4 R23.1 | length 9.4
  Top Layer w0.254: R23.1 19.15,34.975 19.373,34.752 19.448,34.752 21.077,33.123 Q3.4 21.029,32 20.779,32 20.573,31.794 20.573,29.749 20.722,29.6 22.663,29.6 23.161,30.098 Q1.4
PWR_OUT: J2.3 J2.4 Q1.5-6-7-8
RXD: U1.4 U3.2 | length 11.2
  Top Layer w0.254: U1.4 19.675,16.48 18.975,15.78 18.975,12.175 19.45,11.7 23.215,11.7 23.978,12.463 U3.2
SCK: P1.2 U3.13 | length 11.6
  Top Layer w0.254: U3.13 42.02,7.383 P1.2
TXD: U1.1 U3.1 | length 4.9
  Top Layer w0.254: U1.1 22.915,12.67 23.978,13.733 U3.1
VCC: C3.1 J1.3 J1.4 Q3.5-6-7-8 R1.2 R14.2 U2.4 U5.3 | length 41.3
  Top Layer w0.254: U5.3@4.934,7.888 5.097,7.725 U5.3 ; U2.4 19.273,22.877 19.648,22.877 20.231,22.294 20.681,22.294 v1(20.875,22.1) 21.069,22.294 21.369,22.294 21.734,22.659 21.734,23.052 21.982,23.3 R14.2
  Top Layer w1: U5.3@4.934,7.888 v1(4.934,9.65)
  Bottom Layer w1: v1(4.934,9.65) 8.425,9.65 v1(20.875,22.1) 24.348,25.573 24.348,26.348 v1(24.4,26.4) 24.4,28.3 21.716,30.984 19.361,30.984 v1(19.309,31.035)
pads on no net: J1. J2. J3. U1.5 U3.3 U3.4 U3.5 U3.6 U3.10 U3.11 U4.5

## Polygon pours and split planes (outlines as drawn)
GND on Top Layer "GND_L01_P003" (solid, pour order 3): -0.005,37.47 46.35,37.47 46.35,0.005 -0.005,0.005
PWR_OUT on Top Layer "PWR_OUT_L01_P002" (solid, pour order 2): 23.998,32.644 23.998,29.469 32.634,28.58 35.555,28.58 35.555,34.295 32.634,34.295
NetQ1_1 on Top Layer "NETQ1_1_L01_P000" (solid, pour order 0): 20.827,31.573 22.986,32.223 23.486,32.223 23.486,30.573 21.327,29.923 20.827,29.923
VCC on Top Layer "VCC_L01_P001" (solid, pour order 1): 20.311,32.644 20.311,29.469 14.092,28.453 17.177,28.453 10.917,28.453 10.917,34.295 14.092,34.295
GND on Bottom Layer "GND_L02_P004" (solid, pour order 4): -0.005,37.47 46.35,37.47 46.35,0.005 -0.005,0.005

## Silkscreen, mask and mechanical layers (free items; w line width, h text height)
Top Overlay:
  text "IN" at 14.219,30.612 h1.52
  text "OUT" at 28.698,30.612 h1.52
  text "CAN" at 3.171,22.357 h1.52
  text "ACC" at 38.038,21.976 h1.27
  text "KILL" at 37.509,19.436 h1.27
  text "L" at 11.171,19.309 h1.52
  text "GND" at 38.038,16.896 h1.27
  text "5V" at 38.673,14.356 h1.27
  text "H" at 11.171,13.086 h1.52
  text "CS" at 38.673,11.816 h1.27
  text "MOSI" at 37.615,9.276 h1.27
  text "MISO" at 37.509,6.736 h1.27
  text "SCK" at 38.038,4.196 h1.27
  text "JLCJLCJLCJLC" at 29.68,4.095 h0.75 r90
  text "INT" at 38.144,1.656 h1.27
Bottom Overlay:
  drawing of 14 lines, arcs and shapes, not listed
  text "CAN SW V1 / Designed by Serban" at 42.325,0.925 h1